# Altium PCB ATLAS_XP2V5.2016.11.14_BACKUP.PcbDoc (part 1 of 3)
Units mil, origin at the board's own origin, x right, y up, seen from the top; angles counter-clockwise.
Board outline 6300 x 9190 mil, 4 copper layers (Primary Component Side, Ground Plane, Power Plane, Secondary Component Side), stack 35.4 mil thick; 150 components, 228 nets, 1053 pads, 279 vias.
Unrouted connection lines stored in the file: 9.
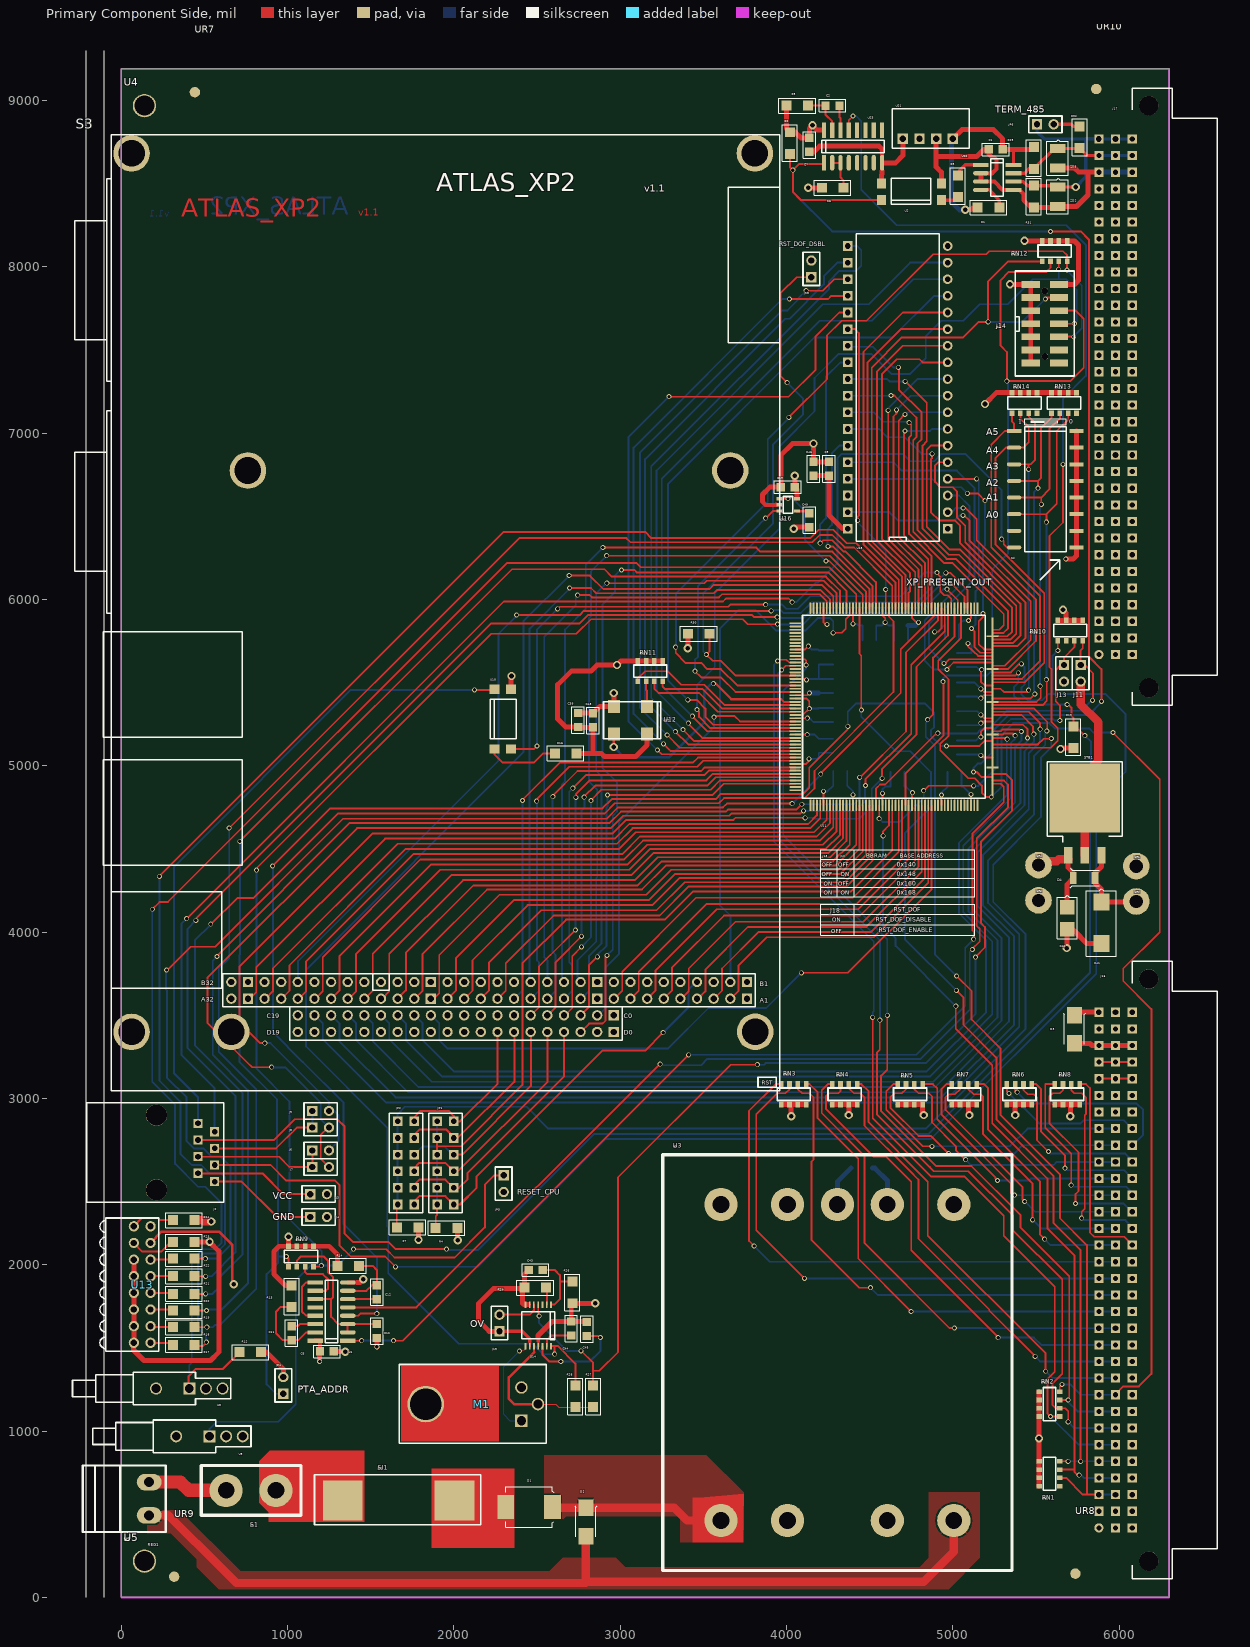
[diagram p0: Primary Component Side view]
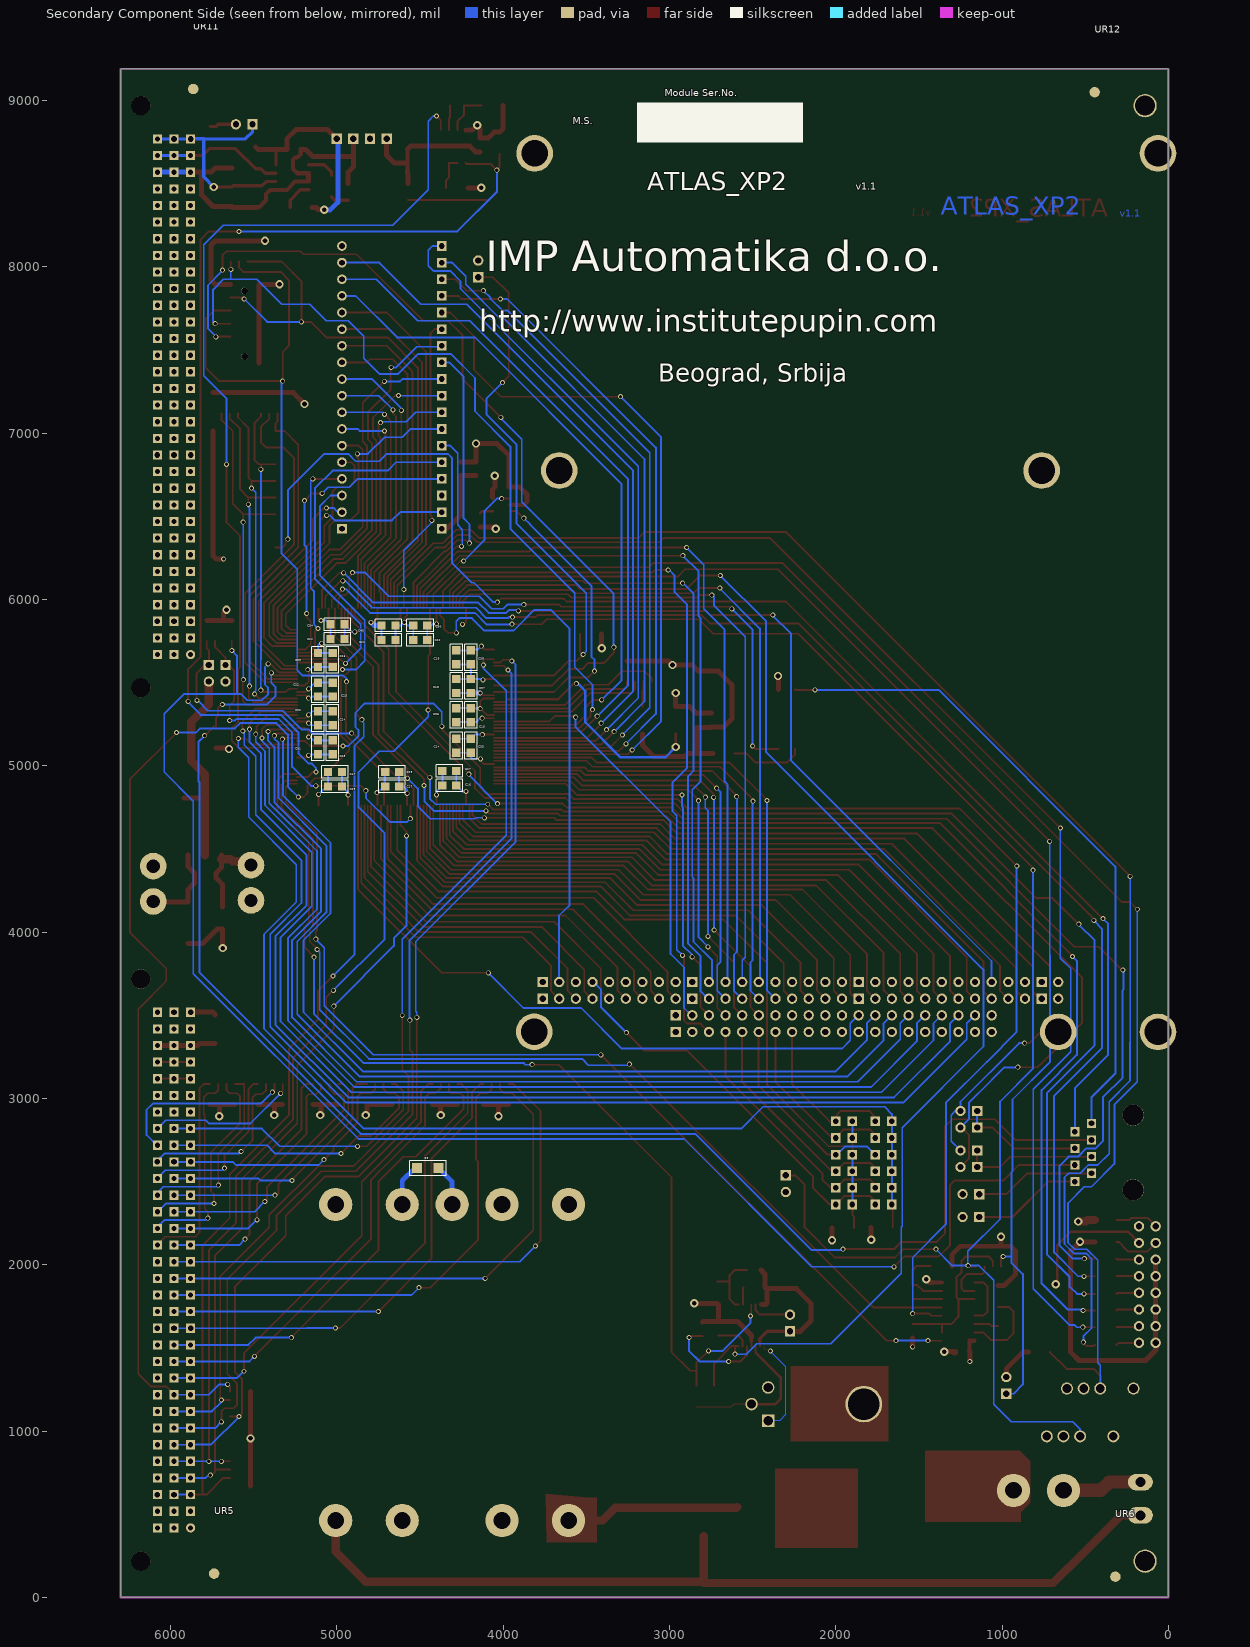
[diagram p1: Secondary Component Side view, seen from below]
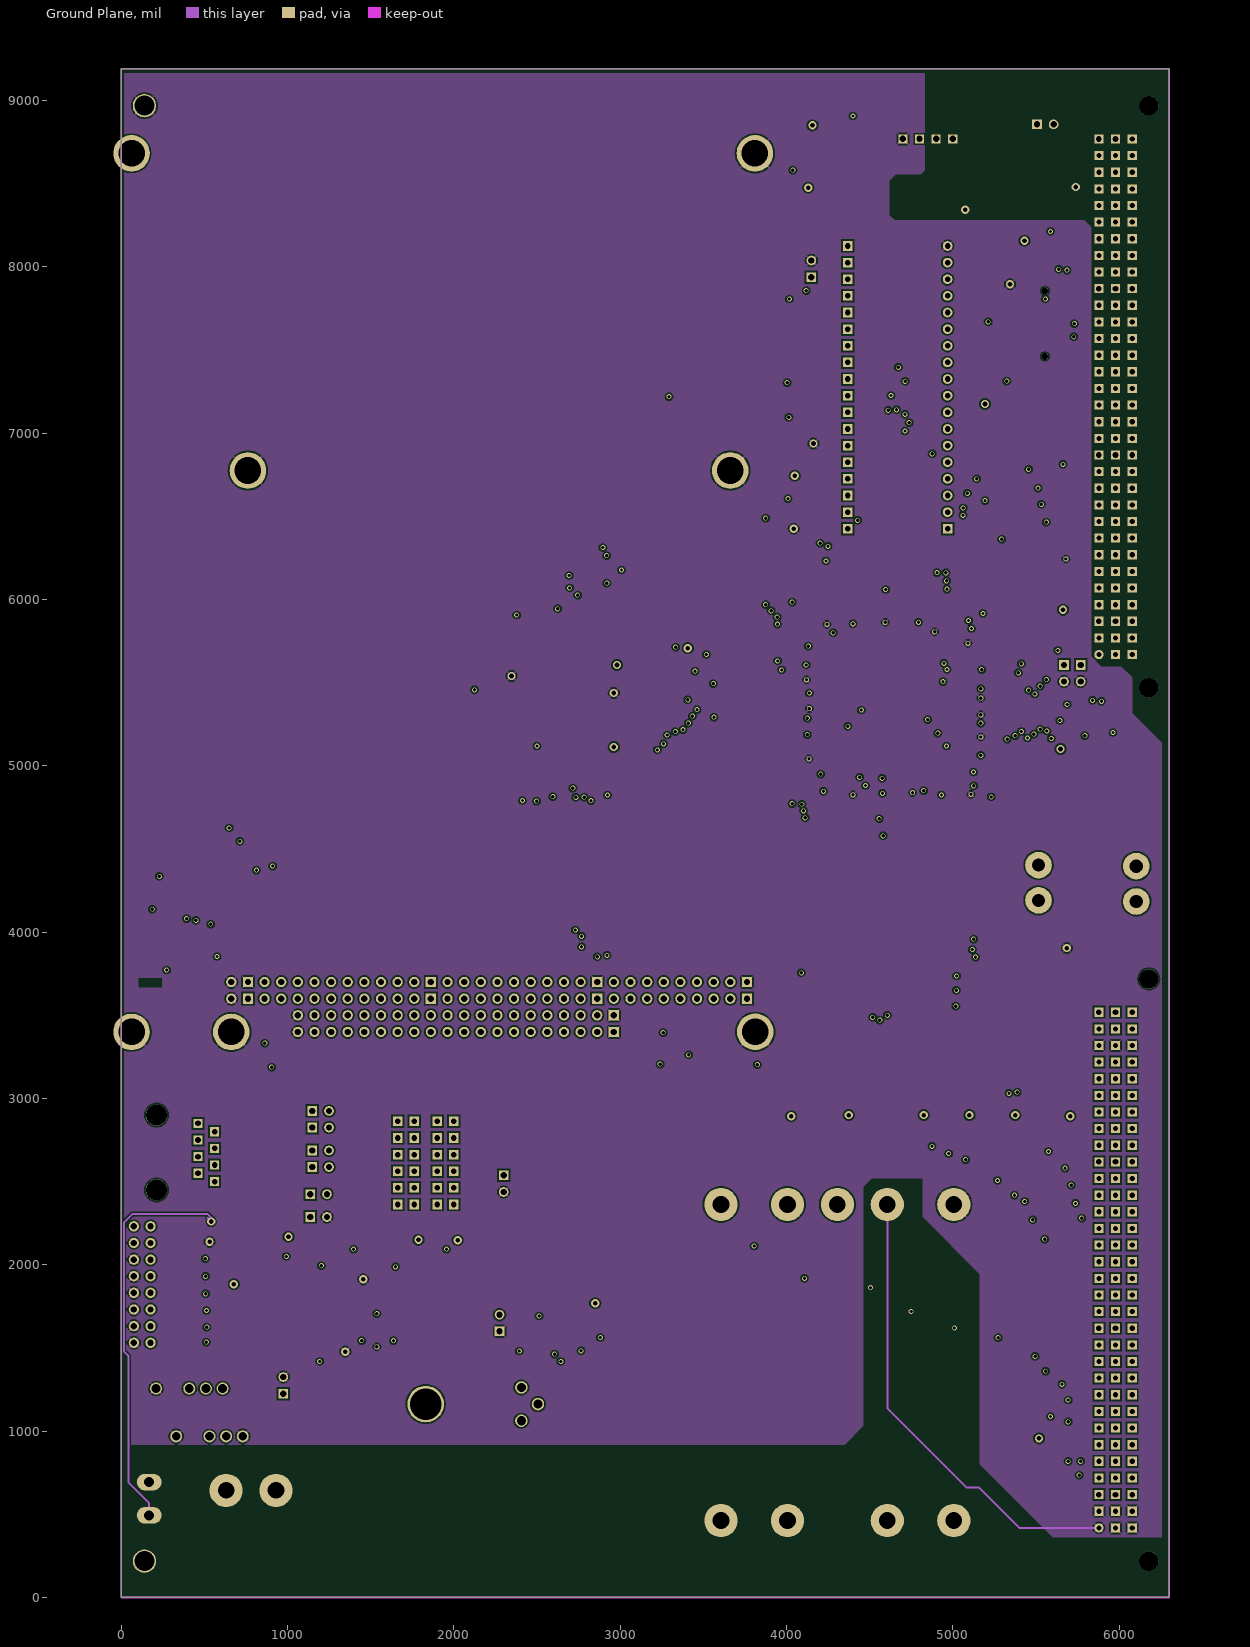
[diagram p2: Ground Plane]
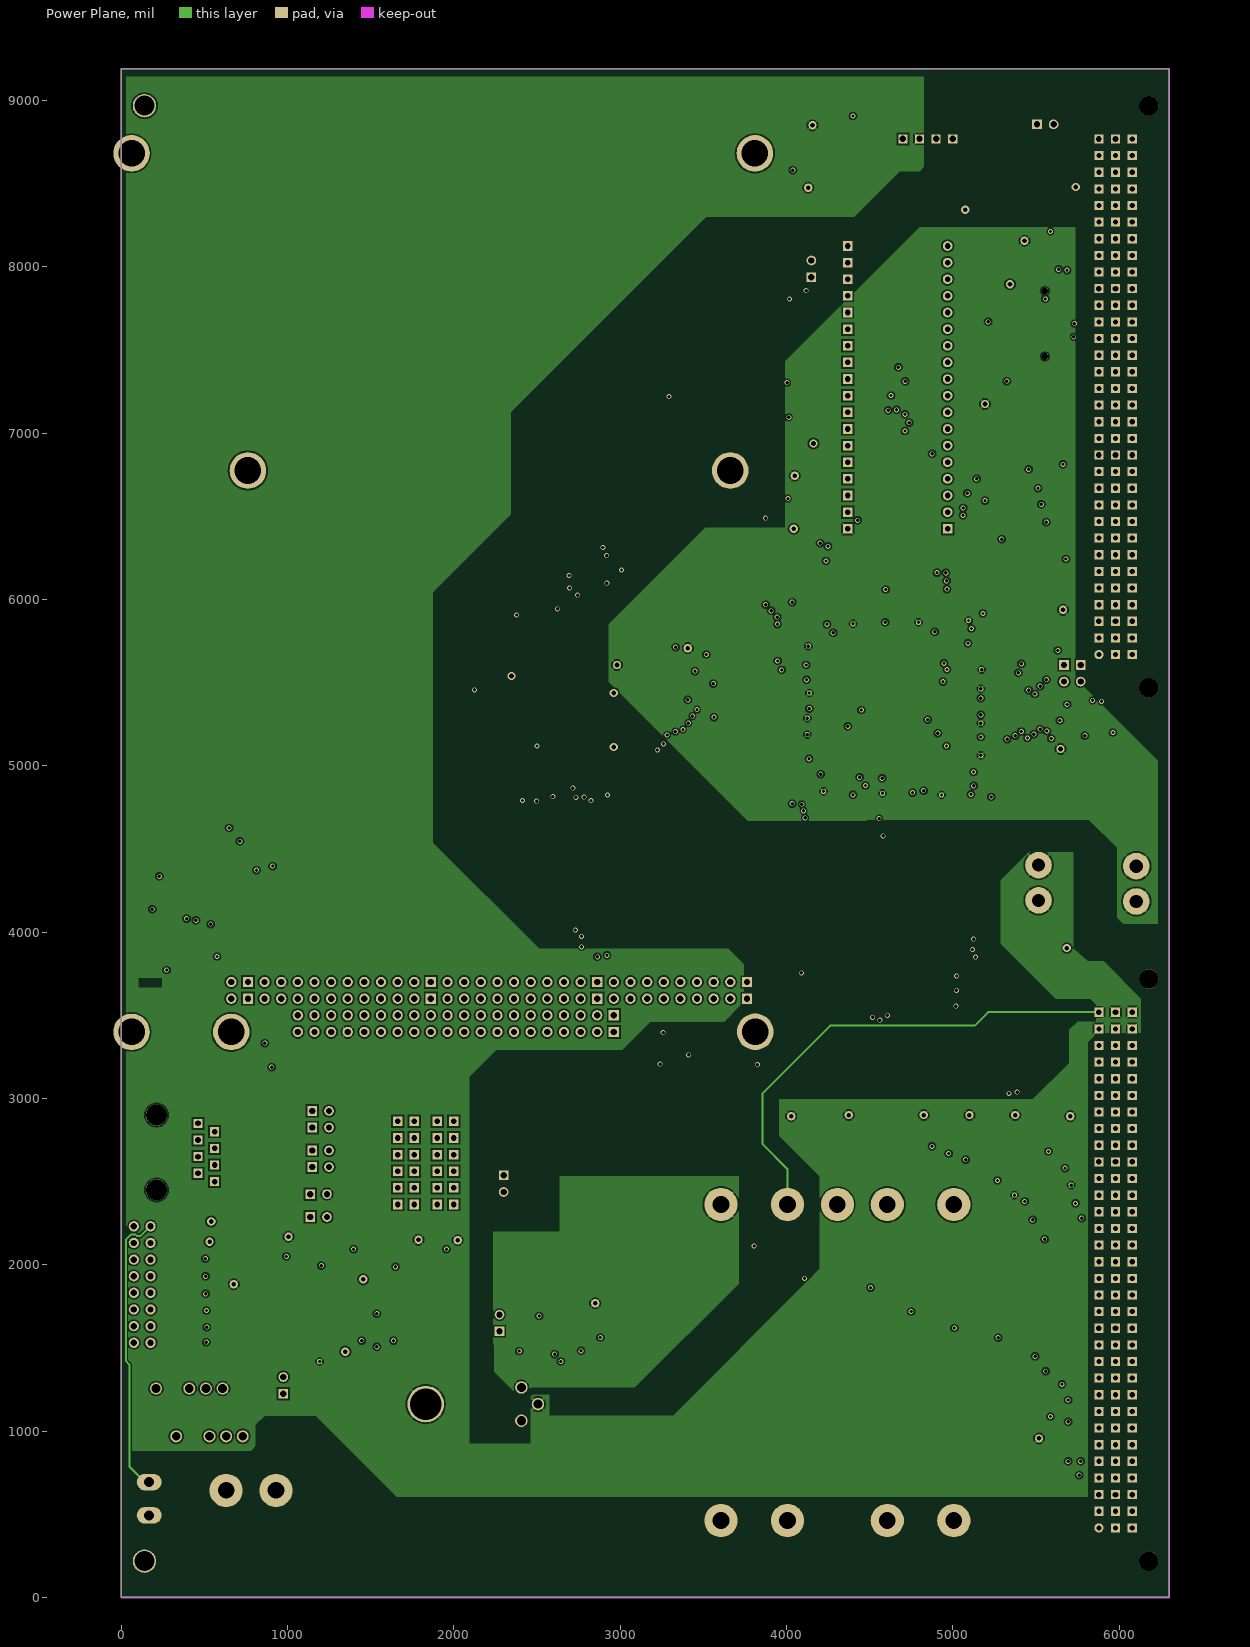
[diagram p3: Power Plane]

## Layer stack, top to bottom
Solder Mask Top: solder mask 0.4, Solder Resist, Dk 3.5
Primary Component Side: signal copper 1.35
Dielectric 1: dielectric 10, FR-4, Dk 4.3
Ground Plane: signal copper 1.35
Dielectric2: dielectric 10, FR-4, Dk 4.3
Power Plane: signal copper 1.35
Dielectric3: dielectric 10, FR-4, Dk 4.3
Secondary Component Side: signal copper 1.35
Solder Mask Bottom: solder mask 0.4, Solder Resist, Dk 3.5

## Board outline
6300,0 6300,9190 0,9190 0,0

## Design rules (kind name [scope] priority, off if disabled: settings)
Clearance "Clearance - Net - VCC_+5V- SMD" [InNet('VCC_+5V') AND IsVia vs IsSMTPin] p1: gap=6
Clearance "Clearance - Net - VCC_+5V - Via" [InNet('VCC_+5V') And IsVia vs IsVia] p2: gap=6
Clearance "Clearance - Default - DEFAULT- SMD" [IsVia vs IsSMTPin] p3: gap=12
Clearance "Clearance - Default - DEFAULT - Via" [IsVia vs IsVia] p4: gap=12
Clearance "Clearance - Default - DEFAULT - Net" [All] p5: gap=10
ComponentClearance "ComponentClearance - Default - DEFAULT" [All] p1: gap=6 collisioncheckmode=3 verticalgap=10 showdistances=FALSE
FanoutControl Fanout_LCC [IsLCC] p1: bgadir=Out bgaviamode=Centered fanoutstyle=Auto fanoutdirection=Alternating viagrid=1 // Fanout_LCC (Default Rule)
FanoutControl Fanout_BGA [IsBGA] p2: bgadir=Out bgaviamode=Centered fanoutstyle=Auto fanoutdirection=Alternating viagrid=1 // Fanout_BGA (Default Rule)
FanoutControl Fanout_Small [(CompPinCount < 5)] p3: bgadir=Out bgaviamode=Centered fanoutstyle=Auto fanoutdirection=OutThenIn viagrid=1 // Fanout_Small (Default Rule)
FanoutControl Fanout_SOIC [IsSOIC] p4: bgadir=Out bgaviamode=Centered fanoutstyle=Auto fanoutdirection=Alternating viagrid=1 // Fanout_SOIC (Default Rule)
HoleToHoleClearance "HoleToHoleClearance - Default - DEFAULT" [All] p1: gap=6 allowstackedmicrovias=TRUE
Length "Default Length" [All] p1: maxlimit=50000 minlimit=0
MaxMinImpedance "Default Impedance" [All] p1: minimum=50.00 maximum=150.0
ParallelSegment "Default Parallel Segment Adjasent" [All] p1: limit=1000 gap=200
ParallelSegment "Default Parallel Segment Same Layer" [All] p2: limit=1000 gap=200
PlaneClearance "PlaneClearance - FootPrint 'MTH_IZVLAKAC_PADS'" [HasFootprint('MTH_IZVLAKAC_PADS')] p1: clearance=5 // PAD - Power Plane Clearance
PlaneClearance "PlaneClearance - FootPrint 'MTH_IZVLAKAC'" [HasFootprint('MTH_IZVLAKAC')] p2: clearance=5 // PAD - Power Plane Clearance
PlaneConnect "Default PlaneConnect" [All] p1: planeconnectstyle=Relief reliefexpansion=20 reliefentries=0 reliefconductorwidth=10 reliefairgap=10
PolygonConnect "PolygonConnect - Default SMT" [IsSMTPin] p1: connectstyle=Relief reliefconductorwidth=10 reliefentries=4 polygonreliefangle="45 Angle" airgapwidth=10
PolygonConnect "PolygonConnect - Default Pad" [All] p2: connectstyle=Relief reliefconductorwidth=10 reliefentries=4 polygonreliefangle="45 Angle" airgapwidth=10
RoomDefinition ISA_XILINX [InComponentClass('ISA_XILINX')] p1: confinementstyle=ConfineIn formatcopy=TRUE lockcomponents=FALSE outline -31225,-29187.5 -29225,-29187.5 -29225,-28187.5 -31225,-28187.5
RoomDefinition WDT_TASTERI_M_S [InComponentClass('WDT_TASTERI_M_S')] p2: confinementstyle=ConfineIn formatcopy=TRUE lockcomponents=FALSE outline -31225,-29187.5 -29225,-29187.5 -29225,-28187.5 -31225,-28187.5
RoomDefinition POWER_SUPPLY [InComponentClass('POWER_SUPPLY')] p3: confinementstyle=ConfineIn formatcopy=TRUE lockcomponents=FALSE outline -31225,-29187.5 -29225,-29187.5 -29225,-28187.5 -31225,-28187.5
RoomDefinition MAX_BUS [InComponentClass('MAX_BUS')] p4: confinementstyle=ConfineIn formatcopy=TRUE lockcomponents=FALSE outline -31225,-29187.5 -29225,-29187.5 -29225,-28187.5 -31225,-28187.5
RoomDefinition "ATLAS_XP2V5.Sheet 5" [InComponentClass('ATLAS_XP2V5.Sheet 5')] p5: confinementstyle=ConfineIn formatcopy=TRUE lockcomponents=FALSE outline -31225,-29187.5 -29225,-29187.5 -29225,-28187.5 -31225,-28187.5
RoutingLayers "RoutingLayers - Default - DEFAULT" [All] p1: top layer_v5=TRUE mid layer 1_v5=TRUE mid layer 2_v5=TRUE bottom layer_v5=TRUE
RoutingPriority "RoutingPriority - Default - DEFAULT" [All] p1: routingpriority=3
RoutingTopology "Default Routing Topology" [All] p1: topology=Shortest
RoutingVias "RoutingVias - Default - DEFAULT" [All] p1: holewidth=20 width=30 viastyle="Through Hole" minholewidth=20 minwidth=30 maxholewidth=20 maxwidth=30
SMDToCorner "SMDToCorner - Net - VCC_+5V" [InNet('VCC_+5V')] p1: distance=60000
SMDToCorner "SMDToCorner - Default - DEFAULT" [All] p2: distance=120000
SolderMaskExpansion [All] p1: expansion=4
Width "Default Width" [All] p1: maxlimit=50 minlimit=10 preferedwidth=12
19 further rules are at their usual default settings.

## Classes and differential pairs
component class WDT_TASTERI_M_S: C10 C11 C12 J2 J3 J4 J5 J6 J7 J8 JP4 JP5 R12 R13 R14 R15 R16 RN9 U1 U8 U9 U10
component class POWER_SUPPLY: C43 C44 C45 D1 D2 J15 M1 R9 R26 R27 R28 R29 REG1 S1 SI1 U3 U14
component class MAX_BUS: C1 C2 C6 C7 D3 J16 J17 JP1 JP2 JP6 R1 R2 R3 R4 R5 R6 R7 R25 R31 R32 RN1 RN2 RN3 RN4 RN5 RN6 RN7 RN8 U2 US1 US2 US3 ZD2 ZD3
component class ISA_XILINX: C14 C15 C16 C17 C18 C19 C20 C21 C22 C23 C24 C25 C26 C27 C28 C29 C30 C31 C32 C33 C34 C35 C36 C37 C38 C39 C40 C41 C42 C47 C48 C50 D4 J11 J13 J14 J18 R17 R18 R19 R20 R21 R22 R23 R24 R30 RN10 RN11 RN12 RN13 RN14 S2 S3 STB1 U4 U5 U11 U12 U13 UR1 UR2 UR3 UR4 UR5 UR6 UR7 UR8 UR9 UR10 UR11 UR12
component class "ATLAS_XP2V5.Sheet 5": C9 C13 C46 C49 U15 U16

## Components (designator, comment, footprint, x,y, rotation, side; value= is the part's Value field where it differs from the comment)
C1 "C" SM$2F$C_0805 5300,8706.25 r180 top
C2 "C" SM$2F$C_0805 4318.75,8968.75 r180 top
C6 "C" SM$2F$C_0805 1195.36,1479.38 r0 top
C7 "C" SM$2F$C_0805 4137.5,8775 r270 top
C9 "C" SM$2F$C_0805 4256.25,6743.75 r90 top
C10 "C_2" SM$2F$C_0805 1537.5,1643.75 r270 top
C11 "C_2" SM$2F$C_0805 1025,1631.25 r270 top
C12 "C_2" SM$2F$C_0805 1537.5,1793.75 r90 top
C13 "C" SM$2F$C_0805 4050,6675 r180 top
C14 "C" SM$2F$C_0805_C14 4281.25,5162.5 r270 bottom
C15 "C" SM$2F$C_0805_C14 4193.75,5262.5 r90 bottom
C16 "C" SM$2F$C_0805_C14 4281.25,4881.25 r0 bottom
C17 "C" SM$2F$C_0805_C14 4625,4875 r0 bottom
C18 "C" SM$2F$C_0805_C14 4281.25,5437.5 r90 bottom
C19 "C" SM$2F$C_0805_C14 4281.25,5693.75 r270 bottom
C20 "C" SM$2F$C_0805_C14 4456.25,5756.25 r0 bottom
C21 "C" SM$2F$C_0805_C14 4731.25,5756.25 r180 bottom
C22 "C" SM$2F$C_0805_C14 5037.5,5762.5 r180 bottom
C23 "C" SM$2F$C_0805_C14 5025,5500 r270 bottom
C24 "C" SM$2F$C_0805_C14 5025,5243.75 r90 bottom
C25 "C" SM$2F$C_0805_C14 4625,4962.5 r0 bottom
C26 "C" SM$2F$C_0805_C14 5025,5593.75 r90 bottom
C27 "C" SM$2F$C_0805_C14 4281.25,4968.75 r0 bottom
C28 "C" SM$2F$C_0805_C14 5025,5068.75 r90 bottom
C29 "C" SM$2F$C_0805_C14 4968.75,4875 r0 bottom
C30 "C" SM$2F$C_0805_C14 5112.5,5243.75 r90 bottom
C31 "C" SM$2F$C_0805_C14 5112.5,5068.75 r90 bottom
C32 "C" SM$2F$C_0805_C14 5112.5,5500 r270 bottom
C33 "C" SM$2F$C_0805_C14 5112.5,5593.75 r90 bottom
C34 "C" SM$2F$C_0805_C14 5037.5,5850 r180 bottom
C35 "C" SM$2F$C_0805_C14 4193.75,5162.5 r270 bottom
C36 "C" SM$2F$C_0805_C14 4281.25,5262.5 r90 bottom
C37 "C" SM$2F$C_0805_C14 4193.75,5437.5 r90 bottom
C38 "C" SM$2F$C_0805_C14 4193.75,5693.75 r270 bottom
C39 "C" SM$2F$C_0805 2748.25,5233 r90 top
C40 "C_4" SM$2F$C_0805_C14 4731.25,5843.75 r180 bottom
C41 "C_4" CASE_D_MILOS 5893.75,4181.25 r270 top
C42 "C_4" CASE_B_MILOS 5687.5,4150 r270 top
C43 "C_3" SM$2F$C_0805 2450,1968.75 r0 top
C44 "C_3" SM$2F$C_0805 2706.25,1575 r90 top
C45 "C_3" SM$2F$C_0805 2800,1656.25 r270 top
C46 "C" SM$2F$C_0805 4162.5,6743.75 r90 top
C47 "C" SM$2F$C_0805_C14 4968.75,4962.5 r0 bottom
C48 "C" SM$2F$C_0805 2837.5,5231.25 r90 top
C49 "C" SM$2F$C_0805 4137.5,6518.75 r270 top
C50 "C_4" SM$2F$C_0805_C14 4456.25,5843.75 r0 bottom
D1 "DIODE_SCHOTTKY_0" SM$2F$DO214AB_21 2312.5,543.75 r180 top
D2 "TRANZORB_0" SM$2F$DO214AC_21 2793.75,368.75 r270 top
D3 "TRANZORB_0" SM$2F$DO214AC_21 5731.25,3331.25 r270 top
D4 "DIODE_ZENER_1" BZV55-C3V3 5725,4325 r0 top
J2 "8_HEADER" TELE$2F$TM.420FACE$2F$8X8_J2 462.5,2850 r90 top
J3 "B2S_0" JUMPER_100_J3 1137.5,2425 r270 top
J4 "B2S_0" JUMPER_100_J3 1137.5,2287.5 r270 top
J5 "B2S_0" JUMPER_100_J3 1150,2925 r270 top
J6 "B2S_0" JUMPER_100_J3 1150,2687.5 r270 top
J7 "B2S_0" JUMPER_100_J3 1150,2587.5 r270 top
J8 "B2S_0" JUMPER_100_J3 1150,2825 r270 top
J11 "HEADER_2/SM" JUMPER_100_J3 5768.75,5606.25 r180 top
J13 "HEADER_2/SM" JUMPER_100_J3 5668.75,5606.25 r180 top
J14 "CONN_FLEX_16/SM" JTAG_SMD_REV2_J14 5468.75,7893.75 r270 top
J15 "B2S_0" JUMPER_100_J3 2275,1600 r0 top
J16 "DIN_96_ABC-R" DIN96_ABC$2F$R_J16 6078.5,3518.5 r270 top
J17 "DIN_96_ABC-R" DIN96_ABC$2F$R_J16 6078.5,8768.5 r270 top
J18 "HEADER_2/SM" JUMPER_100_J3 4150,7937.5 r0 top
JP1 "HEADER_6X2" BLKCON.100$2F$VH$2F$TM2OE$2F$W.200$2F$12_JP1 2000,2362.5 r90 top
JP2 "HEADER_6X2" BLKCON.100$2F$VH$2F$TM2OE$2F$W.200$2F$12_JP2 1762.5,2362.5 r90 top
JP4 "HEADER_2" JUMPER_100_J3 975,1225 r0 top
JP5 "HEADER_2" JUMPER_100_J3 2300,2537.5 r180 top
JP6 "HEADER_2" JUMPER_100_J3 5506.25,8856.25 r270 top
M1 "IRF3415_BODY" IRF3415_PADS_REV1 2506.25,1062.5 r90 top
R1 "RESISTOR_2" SM$2F$R_1206 5150,8356.25 r0 top
R2 "RESISTOR_2" SM$2F$R_1206 4021.25,8808.75 r270 top
R3 "RESISTOR_2" SM$2F$R_1206 5031.25,8550 r270 top
R4 "RESISTOR_2" SM$2F$R_1206 2021.25,2221.25 r180 top
R5 "RESISTOR_2" SM$2F$R_1206 4000,8968.75 r0 top
R6 "RESISTOR_2" SM$2F$R_1206 4212.5,8475 r0 top
R7 "RESISTOR_2" SM$2F$R_1206 1787.5,2225 r180 top
R9 "RESISTOR" SM$2F$R_1206_R9 4387.5,2581.25 r0 bottom
R12 "RESISTOR_2" SM$2F$R_1206 712.5,1475 r0 top
R13 "RESISTOR_2" SM$2F$R_1206 1025,1875 r270 top
R14 "RESISTOR_2" SM$2F$R_1206 1300,1993.75 r0 top
R15 "RESISTOR_2" SM$2F$R_1206 5725,5237.5 r270 top
R16 "RESISTOR_2" SM$2F$R_1206 2737.5,5075 r180 top
R17 "R" SM$2F$R_1206 312.5,1518.75 r0 top
R18 "R" SM$2F$R_1206 312.5,1625 r0 top
R19 "R" SM$2F$R_1206 312.5,1725 r0 top
R20 "R" SM$2F$R_1206 312.5,1825 r0 top
R21 "R" SM$2F$R_1206 312.5,1931.25 r0 top
R22 "R" SM$2F$R_1206 312.5,2037.5 r0 top
R23 "RESISTOR_2" SM$2F$R_1206 312.5,2137.5 r0 top
R24 "RESISTOR_2" SM$2F$R_1206 312.5,2268.75 r0 top
R25 "R" SM$2F$R_1206 5487.5,8718.75 r270 top
R26 "R" SM$2F$R_1206 2712.5,1768.75 r90 top
R27 "R" SM$2F$R_1206 2837.5,1143.75 r90 top
R28 "R" SM$2F$R_1206 2731.25,1143.75 r90 top
R29 "R" SM$2F$R_1206 2425,1862.5 r0 top
R30 "R" SM$2F$R_1206 3537.5,5793.75 r180 top
R31 "R" SM$2F$R_1206 5487.5,8487.5 r270 top
R32 "RESISTOR_2" SM$2F$R_1206 5762.5,8843.75 r270 top
REG1 "8_REGLETA_4" REG2_REV8_REG1 168.75,693.75 r0 top
RN1 "RESAR_IS_4/SM" SMD_RX4 5518.75,818.75 r270 top
RN2 "RESAR_IS_4/SM" SMD_RX4 5518.75,1237.5 r270 top
RN3 "RESAR_IS_4/SM" SMD_RX4 3968.75,2962.5 r0 top
RN4 "RESAR_IS_4/SM" SMD_RX4 4275,2962.5 r0 top
RN5 "RESAR_IS_4/SM" SMD_RX4 4668.75,2962.5 r0 top
RN6 "RESAR_IS_4/SM" SMD_RX4 5325,2962.5 r0 top
RN7 "RESAR_IS_4/SM" SMD_RX4 4993.75,2962.5 r0 top
RN8 "RESAR_IS_4/SM" SMD_RX4 5612.5,2962.5 r0 top
RN9 "RESAR_IS_4/SM" SMD_RX4 1156.25,2112.5 r180 top
RN10 "RESAR_IS_4/SM" SMD_RX4 5781.25,5875 r180 top
RN11 "RESAR_IS_4/SM" SMD_RX4 3256.25,5631.25 r180 top
RN12 "RESAR_IS_4/SM" SMD_RX4 5687.5,8156.25 r180 top
RN13 "RESAR_IS_4/SM" SMD_RX4 5743.75,7243.75 r180 top
RN14 "RESAR_IS_4/SM" SMD_RX4 5506.25,7243.75 r180 top
S1 "SW_SPST_0" SW12V_REV2_S1 631.25,643.75 r0 top
S2 "SW_DIP-8" SMD_DIPSW_100 5368.75,7012.5 r270 top
S3 "CON_EISAE_0" WAFER_PADS_REV2 662.5,3600 r0 top
SI1 "FUSE" FUSEHOLDER3_SI1 1212.5,462.5 r0 top
STB1 "LM3940-3_3V" TO263AA_GND_PLANE_REV1 5693.75,4462.5 r90 top
U1 "74HCT123_1" SOG.050$2F$16$2F$WG.244$2F$L.375 1362.5,1543.75 r90 top
U2 "LTV-817_0" LTV814S 4931.25,8400 r90 top
U3 "VICOR" VIKOR1 5006.25,2362.5 r180 top
U4 "MTHOLE_IZVLAKAC" MTH_IZVLAKAC_PADS 140.55,8968.5 r0 top
U5 "MTHOLE_IZVLAKAC" MTH_IZVLAKAC_PADS 140.55,218.5 r0 top
U8 "SWITCH_BOJKE" TP33WW080-SPST_PADS 410,1256.25 r90 top
U9 "SWITCH_BOJKE" TP33WW080-SPST_PADS 531.25,968.75 r90 top
U10 "LTV-817" LTV814S 2243.75,5100 r0 top
U11 "XCR3256XL-TQ208" QUAD.50M$2F$208$2F$WG30.60_U11 4143.75,4762.5 r0 top
U12 "CLK_GEN33" CLK_GEN33_REV1_U12 3162.5,5356.25 r180 top
U13 "LED8X1" LED_8_REV3_PADS 127,2081.25 r90 top
U14 "TPS2410_1" PDSO-G14_REV7 2431.25,1737.5 r0 top
U15 "DS1265W" DIP.100$2F$36$2F$W.600$2F$L1.850 4968.75,6425 r90 top
U16 "MAX825_T" SOT23_5_MILOS_REV4 3962.5,6606.25 r0 top
UR1 "NAPAJANE_RUPA" NAPAJANJE_RUPA_REV1 6093.75,4356.25 r0 top
UR2 "NAPAJANE_RUPA" NAPAJANJE_RUPA_REV1 6093.75,4143.75 r0 top
UR3 "NAPAJANE_RUPA" NAPAJANJE_RUPA_REV1 5506.25,4150 r0 top
UR4 "NAPAJANE_RUPA" NAPAJANJE_RUPA_REV1 5506.25,4362.5 r0 top
UR5 "FIDUCIAL_PADS" FIDUCIAL_R_TOP 5737.5,143.75 r180 bottom
UR6 "FIDUCIAL_PADS" FIDUCIAL_R_TOP 318.75,125 r180 bottom
UR7 "FIDUCIAL_PADS" FIDUCIAL_R_TOP 443.75,9050 r0 top
UR8 "FIDUCIAL_PADS" FIDUCIAL_R_TOP 5737.5,143.75 r0 top
UR9 "FIDUCIAL_PADS" FIDUCIAL_R_TOP 318.75,125 r0 top
UR10 "FIDUCIAL_PADS" FIDUCIAL_R_TOP 5862.5,9068.75 r0 top
UR11 "FIDUCIAL_PADS" FIDUCIAL_R_TOP 5862.5,9068.75 r180 bottom
UR12 "FIDUCIAL_PADS" FIDUCIAL_R_TOP 443.75,9050 r180 bottom
US1 "HNMODUL0505" DCDC55 4700,8893.75 r0 top
US2 "75176" SOG.050$2F$8$2F$WG.244$2F$L.225 5168.75,8612.5 r270 top
US3 "74HC123_0" SOG.050$2F$16$2F$WG.244$2F$L.375 4225,8625 r0 top
ZD2 "DIODE_ZENER_0" SM$2F$D_1206_21 5631.25,8362.5 r270 top
ZD3 "DIODE_ZENER_0" SM$2F$D_1206_21 5631.25,8593.75 r270 top

## Footprints (in the part's own frame and the unit in brackets; to place one, negate y for a bottom-side part, rotate by r counter-clockwise, add the part's x,y. Pads: shape width x height; smd on the part's side, far side on the other; paste and mask are expansions set on the pad)
BLKCON.100$2F$VH$2F$TM2OE$2F$W.200$2F$12_JP1 [mil]
  rect 58x58 hole 34: 1(0,0) 2(0,100) 3(100,0) 4(100,100) 5(200,0) 6(200,100) 7(300,0) 8(300,100) 9(400,0) 10(400,100) 11(500,0) 12(500,100)
  silkscreen extent -50,-50 550,150
BLKCON.100$2F$VH$2F$TM2OE$2F$W.200$2F$12_JP2 [mil]
  rect 58x58 hole 34: 1(0,0) 2(0,100) 3(100,0) 4(100,100) 5(200,0) 6(200,100) 7(300,0) 8(300,100) 9(400,0) 10(400,100) 11(500,0) 12(500,100)
  silkscreen extent -50,-50 550,150
BZV55-C3V3 [mil]
  rect 40x70 smd paste-2: 1(130,0) 2(0,0)
  silkscreen extent -19,-59 156,59
CASE_B_MILOS [mil]
  rect 86x86 smd: 1(0,0) 2(132,0)
  silkscreen extent -72,-60 191,60
CASE_D_MILOS [mil]
  rect 104x96 smd: 1(0,0) 2(250,0)
  silkscreen extent -80,-90 328,90
CLK_GEN33_REV1_U12 [mil]
  rect 71x79 smd: 1(0,0) 2(200,0) 3(200,165) 4(0,165)
  silkscreen extent -81,-28 262,194
DCDC55 [mil]
  rect 62x62 / inner rect 55x55 / far side rect 62x62 hole 38 mask+2.5: 1(0,-125) 2(100,-125) 3(200,-125) 4(300,-125)
  silkscreen extent -62,-181 400,56
DIN96_ABC$2F$R_J16 [mil]
  rect 55x55 hole 31: A1(0,0) A2(100,0) A3(200,0) A4(300,0) A5(400,0) A6(500,0) A7(600,0) A8(700,0) A9(800,0) A11(1000,0) A12(1100,0) A13(1200,0) A14(1300,0) A15(1400,0) A16(1500,0) A17(1600,0) A18(1700,0) A19(1800,0) A21(2000,0) A22(2100,0) A23(2200,0) A24(2300,0) A25(2400,0) A26(2500,0) A27(2600,0) A28(2700,0) A29(2800,0) A31(3000,0) A32(3100,0) B2(100,-100) B3(200,-100) B4(300,-100) B5(400,-100) B6(500,-100) B7(600,-100) B8(700,-100) B9(800,-100) B11(1000,-100) B12(1100,-100) B13(1200,-100) B14(1300,-100) B15(1400,-100) B16(1500,-100) B17(1600,-100) B18(1700,-100) B19(1800,-100) B21(2000,-100) B22(2100,-100) B23(2200,-100) B24(2300,-100) B25(2400,-100) B26(2500,-100) B27(2600,-100) B28(2700,-100) B29(2800,-100) B31(3000,-100) B32(3100,-100) C2(100,-200) C3(200,-200) C4(300,-200) C5(400,-200) C6(500,-200) C7(600,-200) C8(700,-200) C9(800,-200) C11(1000,-200) C12(1100,-200) C13(1200,-200) C14(1300,-200) C15(1400,-200) C16(1500,-200) C17(1600,-200) C18(1700,-200) C19(1800,-200) C21(2000,-200) C22(2100,-200) C23(2200,-200) C24(2300,-200) C25(2400,-200) C26(2500,-200) C27(2600,-200) C28(2700,-200) C29(2800,-200) C31(3000,-200)
  rect 55x55 hole 34: A10(900,0) A20(1900,0) A30(2900,0) B1(0,-100) B10(900,-100) B20(1900,-100) B30(2900,-100) C1(0,-200) C10(900,-200) C20(1900,-200) C30(2900,-200)
  round 55 hole 31: C32(3100,-200)
  round 116 hole 116: HOLE3(-200,100) HOLE4(3300,100)
  silkscreen extent -305,0 3405,510
DIP.100$2F$36$2F$W.600$2F$L1.850 [mil]
  rect 58x58 hole 34: 1(0,0) 19(1700,600) 20(1600,600) 21(1500,600) 22(1400,600) 23(1300,600) 24(1200,600) 25(1100,600) 26(1000,600) 27(900,600) 28(800,600) 29(700,600) 30(600,600) 31(500,600) 32(400,600) 33(300,600) 34(200,600) 35(100,600) 36(0,600)
  round 58 hole 34: 2(100,0) 3(200,0) 4(300,0) 5(400,0) 6(500,0) 7(600,0) 8(700,0) 9(800,0) 10(900,0) 11(1000,0) 12(1100,0) 13(1200,0) 14(1300,0) 15(1400,0) 16(1500,0) 17(1600,0) 18(1700,0)
  silkscreen extent -75,50 1775,550
FIDUCIAL_R_TOP [mil]
  round 63 smd paste-31.5 mask+31.5: 1(0,0)
FUSEHOLDER3_SI1 [mil]
  rect 240x240 smd mask+2.5: 1(120,120) 2(792.5,120)
  silkscreen extent -50,-25 950,275
IRF3415_PADS_REV1 [mil]
  rect 75x75 / inner round 75 / far side rect 75x75 hole 55 mask+2.5: 1(0,100)
  round 75 hole 55 mask+2.5: 2(100,0) 3(200,100)
  round 220 hole 190: 4(100,675)
  Primary Component Side region: -123,235.5 327,235.5 327,823 -123,823 -123,235.5
  silkscreen extent -135,-50 338,835
JTAG_SMD_REV2_J14 [mil]
  rect 40x110 smd: 1(0,0) 2(0,170) 3(78.7,0) 4(78.7,170) 5(157.5,0) 6(157.5,170) 7(236.22,0) 8(236.22,170) 9(315,0) 10(315,170) 11(393.7,0) 12(393.7,170) 13(472.43,0) 14(472.43,170)
  round 40 hole 40 mask-20: 15(39,85) 16(433,85)
  silkscreen extent -81,-94 550,263
JUMPER_100_J3 [mil]
  rect 62x62 / inner rect 58x58 / far side rect 62x62 hole 38 mask+2.5: 1(0,0)
  round 62 / inner round 58 / far side round 62 hole 38 mask+2.5: 2(0,100)
  silkscreen extent -50,-50 50,150
LED_8_REV3_PADS [mil]
  round 62 hole 38 mask+2.5: 1(-550,-50) 2(-450,-50) 3(-350,-50) 4(-250,-50) 5(-150,-50) 6(-50,-50) 7(50,-50) 8(150,-50) 9(-550,50) 10(-450,50) 11(-350,50) 12(-250,50) 13(-150,50) 14(-50,50) 15(50,50) 16(150,50)
  silkscreen extent -600,-100 200,254
LTV814S [mil]
  rect 60x55 smd: 1(0,0) 2(100,0) 3(100,360) 4(0,360)
  silkscreen extent -25,62 131,300
MTH_IZVLAKAC_PADS [mil]
  round 140 hole 120: 1(0,0)
NAPAJANJE_RUPA_REV1 [mil]
  round 160 hole 80 mask+2.5: 1(9.37,40.62)
PDSO-G14_REV7 [mil]
  rect 9.83x39.37 smd paste-1.68: 1(153.53,23) 2(127.95,23) 3(102.35,23) 4(76.77,23) 5(50.38,23) 6(26,23) 7(0,23) 8(0,-228.52) 9(25.58,-228.52) 10(51.17,-228.52) 11(76.77,-228.52) 12(101.97,-228.52) 13(128.33,-228.52) 14(153.53,-228.52)
  silkscreen extent -24,-187 177,-20
QUAD.50M$2F$208$2F$WG30.60_U11 [mil]
  rect 11x70 smd paste-3.5: 1(0,0) 10(177.3,0) 20(374.3,0) 30(571.3,0) 40(768.3,0) 50(965.3,0) 53(1094.7,90) 54(1094.7,109.7) 55(1094.7,129.4) 56(1094.7,149.1) 57(1094.7,168.8) 58(1094.7,188.5) 59(1094.7,208.2) 61(1094.7,247.6) 62(1094.7,267.3) 63(1094.7,287) 64(1094.7,306.7) 65(1094.7,326.4) 66(1094.7,346.1) 67(1094.7,365.8) 68(1094.7,385.5) 69(1094.7,405.2) 71(1094.7,444.6) 72(1094.7,464.3) 73(1094.7,484) 74(1094.7,503.7) 75(1094.7,523.4) 76(1094.7,543.1) 77(1094.7,562.8) 78(1094.7,582.5) 79(1094.7,602.2) 81(1094.7,641.6) 82(1094.7,661.3) 83(1094.7,681) 84(1094.7,700.7) 85(1094.7,720.4) 86(1094.7,740.1) 87(1094.7,759.8) 88(1094.7,779.5) 89(1094.7,799.2) 91(1094.7,838.6) 92(1094.7,858.3) 93(1094.7,878) 94(1094.7,897.7) 95(1094.7,917.4) 96(1094.7,937.1) 97(1094.7,956.8) 98(1094.7,976.5) 99(1094.7,996.2) 101(1094.7,1035.6) 102(1094.7,1055.3) 103(1094.7,1075) 104(1094.7,1094.7) 110(906.2,1184.7) 120(709.2,1184.7) 130(512.2,1184.7) 140(315.2,1184.7) 150(118.2,1184.7)
  oval 11x70 smd paste-3.5: 2(19.7,0) 3(39.4,0) 4(59.1,0) 5(78.8,0) 6(98.5,0) 7(118.2,0) 8(137.9,0) 9(157.6,0) 11(197,0) 12(216.7,0) 13(236.4,0) 14(256.1,0) 15(275.8,0) 16(295.5,0) 17(315.2,0) 18(334.9,0) 19(354.6,0) 21(394,0) 22(413.7,0) 23(433.4,0) 24(453.1,0) 25(472.8,0) 26(492.5,0) 27(512.2,0) 28(531.9,0) 29(551.6,0) 31(591,0) 32(610.7,0) 33(630.4,0) 34(650.1,0) 35(669.8,0) 36(689.5,0) 37(709.2,0) 38(728.9,0) 39(748.6,0) 41(788,0) 42(807.7,0) 43(827.4,0) 44(847.1,0) 45(866.8,0) 46(886.5,0) 47(906.2,0) 48(925.9,0) 49(945.6,0) 51(985,0) 52(1004.7,0) 105(1004.7,1184.7) 106(985,1184.7) 107(965.3,1184.7) 108(945.6,1184.7) 109(925.9,1184.7) 111(886.5,1184.7) 112(866.8,1184.7) 113(847.1,1184.7) 114(827.4,1184.7) 115(807.7,1184.7) 116(788,1184.7) 117(768.3,1184.7) 118(748.6,1184.7) 119(728.9,1184.7) 121(689.5,1184.7) 122(669.8,1184.7) 123(650.1,1184.7) 124(630.4,1184.7) 125(610.7,1184.7) 126(591,1184.7) 127(571.3,1184.7) 128(551.6,1184.7) 129(531.9,1184.7) 131(492.5,1184.7) 132(472.8,1184.7) 133(453.1,1184.7) 134(433.4,1184.7) 135(413.7,1184.7) 136(394,1184.7) 137(374.3,1184.7) 138(354.6,1184.7) 139(334.9,1184.7) 141(295.5,1184.7) 142(275.8,1184.7) 143(256.1,1184.7) 144(236.4,1184.7) 145(216.7,1184.7) 146(197,1184.7) 147(177.3,1184.7) 148(157.6,1184.7) 149(137.9,1184.7) 151(98.5,1184.7) 152(78.8,1184.7) 153(59.1,1184.7) 154(39.4,1184.7) 155(19.7,1184.7) 156(0,1184.7)
  rect 70x11 smd paste-3.5: 60(1094.7,227.9) 70(1094.7,424.9) 80(1094.7,621.9) 90(1094.7,818.9) 100(1094.7,1015.9) 160(-90,1035.6) 170(-90,838.6) 180(-90,641.6) 190(-90,444.6) 200(-90,247.6)
  oval 70x11 smd paste-3.5: 157(-90,1094.7) 158(-90,1075) 159(-90,1055.3) 161(-90,1015.9) 162(-90,996.2) 163(-90,976.5) 164(-90,956.8) 165(-90,937.1) 166(-90,917.4) 167(-90,897.7) 168(-90,878) 169(-90,858.3) 171(-90,818.9) 172(-90,799.2) 173(-90,779.5) 174(-90,759.8) 175(-90,740.1) 176(-90,720.4) 177(-90,700.7) 178(-90,681) 179(-90,661.3) 181(-90,621.9) 182(-90,602.2) 183(-90,582.5) 184(-90,562.8) 185(-90,543.1) 186(-90,523.4) 187(-90,503.7) 188(-90,484) 189(-90,464.3) 191(-90,424.9) 192(-90,405.2) 193(-90,385.5) 194(-90,365.8) 195(-90,346.1) 196(-90,326.4) 197(-90,306.7) 198(-90,287) 199(-90,267.3) 201(-90,227.9) 202(-90,208.2) 203(-90,188.5) 204(-90,168.8) 205(-90,149.1) 206(-90,129.4) 207(-90,109.7) 208(-90,90)
  silkscreen extent -48,42 1052,1142
REG2_REV8_REG1 [mil]
  oval 150x100 hole 60 mask+2.5: 1(0,0) 2(0,-200)
  silkscreen extent -400,-300 100,100
SM$2F$C_0805 [mil]
  rect 50x50 smd: 1(0,0) 2(84,0)
  silkscreen extent -38,-38 122,38
SM$2F$C_0805_C14 [mil]
  rect 50x50 smd: 1(0,0) 2(84,0)
  silkscreen extent -38,-38 122,38
SM$2F$D_1206_21 [mil]
  rect 56x92 smd: 1(0,0) 2(-117,0)
  silkscreen extent -169,-65 43,63
SM$2F$DO214AB_21 [mil]
  rect 102x146 smd: 1(0,0) 2(-280,0)
  silkscreen extent -288,-123 0,122
SM$2F$DO214AC_21 [mil]
  rect 100x90 smd: 1(0,0) 2(-170,0)
  silkscreen extent -182,-68 5,67
SM$2F$R_1206 [mil]
  rect 60x60 smd: 1(0,0) 2(130,0)
  silkscreen extent -45,-45 175,45
SM$2F$R_1206_R9 [mil]
  rect 60x60 smd: 1(0,0) 2(130,0)
  silkscreen extent -45,-45 175,45
SMD_DIPSW_100 [mil]
  rect 24x86 smd: 1(0,0) 9(700,375) 10(600,375) 11(500,375) 12(400,375) 13(300,375) 14(200,375) 15(100,375) 16(0,375)
  oval 24x86 smd: 2(100,0) 3(200,0) 4(300,0) 5(400,0) 6(500,0) 7(600,0) 8(700,0)
  silkscreen extent -25,62 725,313
SMD_RX4 [mil]
  rect 28x34 smd: 1(0,1) 2(50,1) 3(100,1) 4(150,1) 5(150,124) 6(100,124) 7(50,124) 8(0,124)
  silkscreen extent -25,25 175,100
SOG.050$2F$8$2F$WG.244$2F$L.225 [mil]
  rect 25x94 smd: 1(0,0) 5(150,196) 6(100,196) 7(50,196) 8(0,196)
  oval 25x94 smd: 2(50,0) 3(100,0) 4(150,0)
  silkscreen extent -38,60 188,136
SOG.050$2F$16$2F$WG.244$2F$L.375 [mil]
  rect 25x94 smd: 1(0,0) 9(350,196) 10(300,196) 11(250,196) 12(200,196) 13(150,196) 14(100,196) 15(50,196) 16(0,196)
  oval 25x94 smd: 2(50,0) 3(100,0) 4(150,0) 5(200,0) 6(250,0) 7(300,0) 8(350,0)
  silkscreen extent -13,60 362,136
SOT23_5_MILOS_REV4 [mil]
  rect 35x20 smd paste-1.5: 1(-5,0) 2(-5,-37.4) 3(-5,-74.8) 4(100,-74.8) 5(100,0)
  silkscreen extent 19,-88 75,12
SW12V_REV2_S1 [mil]
  round 200 hole 100 mask+5: 1(0,0) 2(300,0)
  silkscreen extent -150,-150 450,150
TELE$2F$TM.420FACE$2F$8X8_J2 [mil]
  rect 55x55 hole 34: 1(0,0) 2(-50,-100) 3(-100,0) 4(-150,-100) 5(-200,0) 6(-250,-100) 7(-300,0) 8(-350,-100)
  round 128 hole 128: HOLE31(50,250) HOLE32(-400,250)
  silkscreen extent -475,-155 125,670
TO263AA_GND_PLANE_REV1 [mil]
  rect 100x50 smd: 1(0,0) 2(0,-100) 3(0,-200)
  rect 412x425 smd: 4(343.75,-100)
  silkscreen extent 78,-325 562,125
TP33WW080-SPST_PADS [mil]
  rect 72x72 / inner round 72 / far side round 72 hole 52 mask+2.5: 1(0,0)
  round 72 hole 52 mask+2.5: 2(0,-100) 3(0,-200) 4(0,200)
  silkscreen extent -98,-250 98,702
VIKOR1 [mil]
  round 200 hole 100 mask+5: 1(1400,1900) 2(1000,1900) 3(400,1900) 4(0,1900) 5(1400,0) 6(1000,0) 7(700,0) 8(400,0) 9(0,0)
  silkscreen extent -350,-300 1750,2200
WAFER_PADS_REV2 [mil]
  rect 62x62 hole 38 mask+1.5: A1(3100,0) A10(2200,0) A20(1200,0) A31(100,0) B1(3100,100) B10(2200,100) B20(1200,100) B31(100,100) C0(2300,-100) D0(2300,-200)
  round 62 hole 38 mask+1.5: A2(3000,0) A3(2900,0) A4(2800,0) A5(2700,0) A6(2600,0) A7(2500,0) A8(2400,0) A9(2300,0) A11(2100,0) A12(2000,0) A13(1900,0) A14(1800,0) A15(1700,0) A16(1600,0) A17(1500,0) A18(1400,0) A19(1300,0) A21(1100,0) A22(1000,0) A23(900,0) A24(800,0) A25(700,0) A26(600,0) A27(500,0) A28(400,0) A29(300,0) A30(200,0) A32(0,0) B2(3000,100) B3(2900,100) B4(2800,100) B5(2700,100) B6(2600,100) B7(2500,100) B8(2400,100) B9(2300,100) B11(2100,100) B12(2000,100) B13(1900,100) B14(1800,100) B15(1700,100) B16(1600,100) B17(1500,100) B18(1400,100) B19(1300,100) B21(1100,100) B22(1000,100) B23(900,100) B24(800,100) B25(700,100) B26(600,100) B27(500,100) B28(400,100) B29(300,100) B30(200,100) B32(0,100) C1(2200,-100) C2(2100,-100) C3(2000,-100) C4(1900,-100) C5(1800,-100) C6(1700,-100) C7(1600,-100) C8(1500,-100) C9(1400,-100) C10(1300,-100) C11(1200,-100) C12(1100,-100) C13(1000,-100) C14(900,-100) C15(800,-100) C16(700,-100) C17(600,-100) C18(500,-100) C19(400,-100) D1(2200,-200) D2(2100,-200) D3(2000,-200) D4(1900,-200) D5(1800,-200) D6(1700,-200) D7(1600,-200) D8(1500,-200) D9(1400,-200) D10(1300,-200) D11(1200,-200) D12(1100,-200) D13(1000,-200) D14(900,-200) D15(800,-200) D16(700,-200) D17(600,-200) D18(500,-200) D19(400,-200)
  round 220 hole 160 mask+5: MTH1(-599.61,-200) MTH2(0,-200) MTH3(3150,-199.21) MTH4(100,3175) MTH5(3000,3175) MTH6(-599.61,5081.89) MTH7(3148.03,5081.89)
  silkscreen extent -941,-553 3297,5195

## Part data
U4 U5: "Rupa za Rittal-ov izvlakac"
U8: "CW_TASTER"
U9: "RST_TASTER"
U13: "LED8x1"

## Via types
v1: diameter 30, hole 20, Primary Component Side to Secondary Component Side, 245 vias
v2: diameter 50, hole 28, Primary Component Side to Secondary Component Side, 34 vias

## Nets (pads, with @x,y where several pads share a name; then routed paths per layer and width w, separated by ;. In a path a pad name is that pad's centre, name@x,y a point inside that pad or via, vN(x,y) a via of type N, cw(c..) or ccw(c..) an arc to the next point about the centre after c; other vN are vias at no path point)
+V: J16.A4 J16.B4 J16.C4 | length 200
  Primary Component Side w12: J16.C4@5878.5,3218.5 J16.B4@5978.5,3218.5 J16.A4@6078.5,3218.5
-V: J16.A5 J16.B5 J16.C5 | length 200
  Primary Component Side w12: J16.C5@5878.5,3118.5 J16.B5@5978.5,3118.5 J16.A5@6078.5,3118.5
/FLTB1: R27.2 U11.58 U14.4 | length 6127
  Primary Component Side w11: U14.4@2508.02,1760.5 2508.02,1696.98 v1(2513,1692) ; v1(2765,1483) 2838,1410 2838,1362.5 ; R27.2@2837.5,1273.75 2838,1274.25 2838,1362.5 ; v1(3825,3203) 3665.5,3203 2987.5,2525 2987.5,1475 2875,1362.5 2838,1362.5 ; v1(5137,3849) 5137,3852 5193.75,3908.75 5193.75,4030.25 5168.75,4057.25 5168.75,4543.75 5356.25,4731.25 5356.25,4912.5 5317.75,4951 U11.58@5238.45,4951
  Secondary Component Side w11: v1(2513,1692) 2513,1649.5 2681.25,1481.25 2763.25,1481.25 v1(2765,1483) ; v1(3825,3203) 3865.5,3203 3875,3212.5 4837.5,3212.5 5137.5,3510 5137.5,3849.5 v1(5137,3849)
/NVRAM_RST: U11.140 U16.1 | length 924.8
  Primary Component Side w11: U16.1@3957.5,6606.25 4008.75,6606.25 v1(4009,6606) ; v1(4237.5,6231.25) 4256.25,6231.25 4458.95,6028.55 U11.140@4458.95,5947.2
  Secondary Component Side w11: v1(4009,6606) 4009.25,6606.25 4037.5,6606.25 4112.5,6531.25 4112.5,6356.25 v1(4237.5,6231.25)
A0: RN13.7 S2.6 U11.79 | length 2317.3
  Primary Component Side w11: U11.79@5238.45,5364.7 5539.7,5364.7 5565,5390 5565,5515 v1(5562,5518) ; S2.6@5368.75,6512.5 5562.5,6512.5 ; v1(5562.5,6464.5) 5562.5,6512.5 ; RN13.7@5693.75,7119.75 5693.75,7081.25 5625,7012.5 5625,6575 5562.5,6512.5
  Secondary Component Side w11: v1(5562,5518) 5562.5,5517.5 v1(5562.5,6464.5)
A1: RN13.6 S2.5 U11.80 | length 2224.7
  Primary Component Side w11: U11.80@5238.45,5384.4 5503.15,5384.4 5529,5410.25 5529,5475 v1(5525,5479) ; S2.5@5368.75,6612.5 5531.25,6612.5 ; v1(5532,6572) 5532,6611.75 5531.25,6612.5 ; RN13.6@5643.75,7119.75 5643.75,7087.5 5581.25,7025 5581.25,6662.5 5531.25,6612.5
  Secondary Component Side w11: v1(5525,5479) 5525,6550 5532,6557 v1(5532,6572)
A2: RN13.5 S2.4 U11.81 | length 2145.4
  Primary Component Side w11: U11.81@5238.45,5404.1 5466.6,5404.1 v1(5493.75,5431.25) ; S2.4@5368.75,6712.5 5512.5,6712.5 ; v1(5512.5,6668.75) 5512.5,6712.5 ; RN13.5@5593.75,7119.75 5593.75,7093.75 5531.25,7031.25 5531.25,6731.25 5512.5,6712.5
  Secondary Component Side w11: v1(5493.75,5431.25) 5493.75,5443.75 5487.5,5450 5487.5,6643.75 v1(5512.5,6668.75)
A3: RN14.7 S2.3 U11.84 | length 2023.3
  Primary Component Side w11: U11.84@5238.45,5463.2 5286.8,5463.2 5306.25,5443.75 5445.75,5443.75 5456,5454 v1(5456,5455) ; S2.3@5368.75,6812.5 5456,6812.5 ; v1(5456,6782) 5456,6812.5 ; RN14.7@5456.25,7119.75 5456.25,7100 5493.75,7062.5 5493.75,6837.5 5468.75,6812.5 5456,6812.5
  Secondary Component Side w11: v1(5456,5455) 5457,5455 5457,5637.5 5456.25,5637.5 5456,5637.75 v1(5456,6782)
A4: RN14.6 S2.2 U11.86 | length 2147.9
  Primary Component Side w11: U11.86@5238.45,5502.6 5433.02,5502.6 5550,5618.75 5550,6037.5 5256.25,6331.25 5256.25,6850 5318.75,6912.5 S2.2@5368.75,6912.5 5425,6912.5 5456.25,6943.75 5456.25,7037.5 5406.25,7087.5 RN14.6@5406.25,7119.75
A5: RN14.5 S2.1 U11.87 | length 2036.9
  Primary Component Side w11: U11.87@5238.45,5522.3 5416.05,5522.3 5525,5631.25 5525,6018.75 5231.25,6312.5 5231.25,6931.25 5312.5,7012.5 S2.1@5368.75,7012.5 5368.75,7056.25 5356.25,7068.75 RN14.5@5356.25,7119.75
ADDRESS_MAX0: U11.153
ADDRESS_MAX1: U11.154
ADDRESS_MAX2: U11.159
ADDRESS_MAX3: U11.160
ADDRESS_MAX4: U11.161
ADDRESS_MAX5: U11.162
ADDRESS_MAX6: U11.163
ADDRESS_MAX7: U11.164
ADDRESS_MAX_BUS0: J16.B16 J16.C16 RN3.8 | length 3297.3
  Primary Component Side w11: v1(3806.25,2112.5) 3775,2143.75 3775,2925 3936.5,3086.5 RN3.8@3968.75,3086.5
  Secondary Component Side w11: v1(3806.25,2112.5) 3900,2018.5 J16.C16@5878.5,2018.5 J16.B16@5978.5,2018.5
ADDRESS_MAX_BUS1: J16.B17 J16.C17 RN3.7 | length 3270.2
  Primary Component Side w11: RN3.7@4018.75,3086.5 4018.75,3056.25 3993.75,3031.25 3943.75,3031.25 3818.75,2906.25 3818.75,2208.25 v1(4108.25,1918.75)
  Secondary Component Side w11: v1(4108.25,1918.75) 4118.75,1918.75 4119,1918.5 J16.C17@5878.5,1918.5 J16.B17@5978.5,1918.5
ADDRESS_MAX_BUS2: J16.B18 J16.C18 RN3.6 | length 2972
  Primary Component Side w11: RN3.6@4068.75,3086.5 4068.75,3056.25 4093.75,3031.25 4137.5,3031.25 4162.5,3006.25 4162.5,2631.25 4150,2618.75 4150,2150 4437.5,1862.5 v1(4505.5,1862.5)
  Secondary Component Side w11: v1(4505.5,1862.5) 4549.5,1818.5 J16.C18@5878.5,1818.5 J16.B18@5978.5,1818.5
ADDRESS_MAX_BUS3: J16.B19 J16.C19 RN3.5 | length 2869.2
  Primary Component Side w11: RN3.5@4118.75,3086.5 4138.5,3086.5 4187.5,3037.5 4187.5,2881.25 4431.25,2637.5 4431.25,2037.75 v1(4750.25,1718.75)
  Secondary Component Side w11: v1(4750.25,1718.75) 4800,1718.75 4800.25,1718.5 J16.C19@5878.5,1718.5 J16.B19@5978.5,1718.5
ADDRESS_MAX_BUS4: J16.B20 J16.C20 RN4.8 | length 2824.6
  Primary Component Side w11: RN4.8@4275,3086.5 4249,3086.5 4212.5,3050 4212.5,2912.5 4468.75,2656.25 4468.75,2131.25 4980,1620 v1(5009,1620)
  Secondary Component Side w11: v1(5009,1620) 5179.5,1620 5181,1618.5 J16.C20@5878.5,1618.5 J16.B20@5978.5,1618.5
ADDRESS_MAX_BUS5: J16.B21 J16.C21 RN4.7 | length 2793.1
  Primary Component Side w11: RN4.7@4325,3086.5 4325,3043.75 4312.5,3031.25 4256.25,3031.25 4237.5,3012.5 4237.5,2937.5 4525,2650 4600,2650 4750,2500 4750,2087.5 5275.25,1562.25 5275,1562 v1(5273,1562)
  Secondary Component Side w11: v1(5273,1562) 5488,1562 5531.5,1518.5 J16.C21@5878.5,1518.5 J16.B21@5978.5,1518.5
ADDRESS_MAX_BUS6: J16.B22 J16.C22 RN4.6 | length 2619.7
  Primary Component Side w11: RN4.6@4375,3086.5 4375,3062.5 4406.25,3031.25 4443.75,3031.25 4468.75,3006.25 4468.75,2837.5 4737.17,2568.75 4737.5,2568.75 4793.75,2512.5 4793.75,2156.25 5218.75,1731.25 5218.75,1725.23 v1(5495,1449.25)
  Secondary Component Side w11: v1(5495,1449.25) 5525.25,1418.5 J16.C22@5878.5,1418.5 J16.B22@5978.5,1418.5
ADDRESS_MAX_BUS7: J16.B23 J16.C23 RN4.5 | length 2648.6
  Primary Component Side w11: RN4.5@4425,3086.5 4451,3086.5 4493.75,3043.75 4493.75,2856.45 4850,2500 4850,2175.25 5558,1467 v1(5558,1360)
  Secondary Component Side w11: v1(5558,1360) 5558.75,1360 5600.25,1318.5 J16.C23@5878.5,1318.5 J16.B23@5978.5,1318.5
AEN: S3.A11 U11.148 | length 4102.1
  Primary Component Side w11: v1(2920,6098) 2921,6097 3506.25,6097 3522,6112.5 4225,6112.5 4301.35,6036.15 U11.148@4301.35,5947.2
  Secondary Component Side w11: S3.A11@2763.75,3600 2768.75,3600 2812.5,3643.75 2812.5,3856.25 2887.5,3931.25 2887.5,4937.5 2856.25,4968.75 2856.25,6037.5 2916.75,6098 v1(2920,6098)
ALE: S3.B28 U11.108 | length 5734.7
  Primary Component Side w11: v1(2378,5906) 2378.25,5906.25 2756.25,5906.25 2781.25,5931.25 3908.75,5931.25 v1(3908,5932) ; v1(4958.5,6160.25) 4983.5,6160.25 5089.35,6054.4 U11.108@5089.35,5947.2
  Secondary Component Side w11: S3.B28@1063.75,3700 1063.75,3826.25 2268.75,5031.25 2268.75,5793.75 2378,5903 v1(2378,5906) ; v1(3908,5932) 3913,5937 3963,5937 3981.25,5918.75 4087.5,5918.75 4150,5981.25 4779.5,5981.25 v1(4958.5,6160.25)
BALE: J16.B25 J16.C25 RN2.7 U11.168 | length 5812.6
  Primary Component Side w11: U11.168@4053.75,5640.5 4109.5,5640.5 4118.75,5631.25 v1(4118.75,5606.25) ; v1(4606.25,3500) 4606.25,3173 4568.75,3137.5 4568.75,2924.4 4899.4,2593.75 5112.5,2593.75 5406.25,2300 5406.25,2225 5700,1931.25 5700,1193 v1(5694,1187) 5693.5,1187.5 RN2.7@5642.75,1187.5
  Secondary Component Side w11: v1(4118.75,5606.25) 4118.75,5587.5 3981.25,5450 3981.25,4581.25 4606.25,3956.25 v1(4606.25,3500) ; v1(5694,1187) 5694,1174.25 5750.25,1118.5 J16.C25@5878.5,1118.5 J16.B25@5978.5,1118.5
BASE_ADDR_JP0: J11.1 RN10.8 U11.21 | length 2038.1
  Primary Component Side w11: U11.21@4537.75,4762.5 4537.75,4862.5 4543.75,4868.5 4543.75,4868.75 4562.5,4887.5 4593.75,4887.5 4893,5186.75 4900.75,5186.75 v1(4910,5196) ; RN10.8@5781.25,5751 5781.25,5706.25 5768.75,5693.75 J11.1@5768.75,5606.25 5793.75,5606.25 5843,5556.25 5843,5396 v1(5840,5393)
  Secondary Component Side w11: v1(4910,5196) 4907.75,5193.75 5143.75,5193.75 5168.75,5218.75 5212.5,5218.75 5325,5331.25 5775,5331.25 5836.75,5393 v1(5840,5393)
BASE_ADDR_JP1: J13.1 RN10.7 U11.22 | length 2129.2
  Primary Component Side w11: v1(4557.45,4682.45) U11.22@4557.45,4762.5 ; v1(4825,4850) 4856.25,4880 5125,4880 v1(5126,4879) ; v1(5644,5272) 5643.75,5272.25 5643.75,5362.5 5618.75,5387.5 5618.75,5575 5650,5606.25 J13.1@5668.75,5606.25 5668.75,5650 5731.25,5712.5 RN10.7@5731.25,5751
  Secondary Component Side w11: v1(4557.45,4682.45) 4577.4,4662.5 4681.25,4662.5 4825,4806.25 v1(4825,4850) ; v1(5126,4879) 5154,4879 5175,4900 5175,4900.47 5268.75,4993.22 5268.75,5200 5350,5281.25 5603.25,5281.25 5612.5,5272 v1(5644,5272)
BIQ_1: J16.B29 J16.C29 RN1.7 U11.25 | length 4848.8
  Primary Component Side w11: v1(4581,4579) 4581.25,4579.25 4581.25,4606.25 4616.55,4641.55 U11.25@4616.55,4762.5 ; v1(5018,3555) 5018,3419.5 5237.5,3200 5237.5,2850 5568.75,2518.75 5568.75,2218.75 5731.25,2056.25 5731.25,768.75 ; RN1.7@5642.75,768.75 5731.25,768.75 ; v1(5760,735) 5752.5,735 5731.25,756.25 5731.25,768.75
  Secondary Component Side w11: v1(4581,4579) 4581.25,4578.75 4581.25,4037.5 4656.25,3962.5 4656.25,3916.75 v1(5018,3555) ; v1(5760,735) 5771.25,735 5787.5,718.75 5878.25,718.75 J16.C29@5878.5,718.5 J16.B29@5978.5,718.5
BIQ_2: J16.B30 J16.C30 RN1.6 U11.112 | length 6178.9
  Primary Component Side w11: v1(4849,5277) 4881.25,5309.25 4881.25,5650 5010.55,5779.3 U11.112@5010.55,5947.2 ; v1(5023,3736) 5112.5,3646.5 5112.5,3475 5287.5,3300 5287.5,2900 5643.75,2543.75 5643.75,2281.25 5806.25,2118.75 5806.25,618.5 ; RN1.6@5642.75,718.75 5681.25,718.75 5781.5,618.5 5806.25,618.5 ; J16.C30@5878.5,618.5 5806.25,618.5
  Secondary Component Side w11: v1(4849,5277) 4849,5268.75 4837.5,5257.25 4837.5,5175 4893.75,5118.75 4893.75,3865.25 v1(5023,3736) ; J16.C30@5878.5,618.5 J16.B30@5978.5,618.5
BRD: J16.B27 J16.C27 RN2.5 U11.169 | length 6031.7
  Primary Component Side w11: v1(3947,5630) 3954.5,5637.5 3999.25,5637.5 4016.57,5620.8 U11.169@4053.75,5620.8 ; v1(4518.75,3487.5) 4518.75,2881.25 4868.75,2531.25 5068.75,2531.25 5306.25,2293.75 5306.25,2175 5612.5,1868.75 5612.5,1356.25 5568.75,1312.5 5568.75,1106.25 v1(5587.5,1087.5) RN2.5@5642.75,1087.5
  Secondary Component Side w11: v1(3947,5630) 3947,5628.25 3925,5606.25 3925,4543.75 4525,3943.75 4525,3525 4518.75,3518.75 v1(4518.75,3487.5) ; v1(5587.5,1087.5) 5756.25,918.75 5878.25,918.75 J16.C27@5878.5,918.5 J16.B27@5978.5,918.5
BRDY: J16.B24 J16.C24 RN2.8 U11.110 | length 7327.2
  Primary Component Side w11: U11.110@5049.95,5947.2 5049.95,5768.7 4912.5,5631.25 4912.5,5581.25 4975,5518.75 4975,5181.25 4925,5131.25 4925,5093.75 5093.75,4925 5131.25,4925 5175,4881.25 5175,4837.5 5200,4812.5 v1(5231.25,4812.5) ; RN2.8@5642.75,1237.5 5642.75,1267.75 v1(5656.25,1281.25) ; v1(5963,5200) 6243.75,4919.25 6243.75,4000 6025,3781.25 6025,3706.25 6193.75,3537.5 6193.75,1343.75 6118.75,1268.75 6025,1268.75 5978.5,1222.25 J16.B24@5978.5,1218.5
  Secondary Component Side w11: v1(5231.25,4812.5) 5293.75,4875 5293.75,5187.5 5362.5,5256.25 5581.25,5256.25 5612.5,5225 5820,5225 5845,5200 v1(5963,5200) ; v1(5656.25,1281.25) 5706.25,1281.25 5769,1218.5 J16.C24@5878.5,1218.5 J16.B24@5978.5,1218.5
BWR: J16.B26 J16.C26 RN2.6 U11.170 | length 5866.4
  Primary Component Side w11: v1(3971,5576) 3996.1,5601.1 U11.170@4053.75,5601.1 ; v1(4561,3471) 4561,3292.25 4543.75,3275 4543.75,2906.25 4862.5,2587.5 4862.6,2587.5 4886.9,2562.5 5093.75,2562.5 5362.5,2293.75 5362.5,2204.6 5658,1912.1 5658,1345.5 5600,1287.5 5600,1156.25 5618.75,1137.5 RN2.6@5642.75,1137.5 5675,1137.5 5693.75,1118.75 v1(5693.75,1056.25)
  Secondary Component Side w11: v1(3971,5576) 3969.75,5576 3950,5556.25 3950,4562.5 4562.5,3950 4562.5,3469.5 v1(4561,3471) ; v1(5693.75,1056.25) 5731.5,1018.5 J16.C26@5878.5,1018.5 J16.B26@5978.5,1018.5
CLK0: U11.181 U12.3 | length 1535
  Primary Component Side w11: 3984.35,5384.4 U11.181@4053.75,5384.4
  Primary Component Side w12: 3968.75,5400 3984.35,5384.4
  Primary Component Side w15: v2(2962.5,5112.5) U12.3@2962.5,5191.25 ; v1(3560,5494) 3560.25,5493.75 3575,5493.75 3668.75,5400 3968.75,5400
  Secondary Component Side w15: v2(2962.5,5112.5) 3025,5050 3293.75,5050 3506.25,5262.5 3506.25,5450 3550.25,5494 v1(3560,5494)
CLK1: RN11.5 U11.182 | length 1067.9
  Primary Component Side w11: RN11.5@3106.25,5507.25 3106.25,5525 3150,5568.75 3287.5,5568.75 3368.75,5487.5 3507.15,5487.5 3629.95,5364.7 U11.182@4053.75,5364.7
CLK2: RN11.8 U11.183 | length 883.3
  Primary Component Side w11: RN11.8@3256.25,5507.25 3256.25,5475 3268.75,5462.5 3493.27,5462.5 3611.78,5345 U11.183@4053.75,5345
CLK3: RN11.7 U11.184 | length 949
  Primary Component Side w11: RN11.7@3206.25,5507.25 3206.25,5462.5 3231.25,5437.5 3474.83,5437.5 3587.33,5325.3 U11.184@4053.75,5325.3
CW6: JP4.1 RN9.5 U11.147 | length 8073.1
  Primary Component Side w11: v1(714,4545.75) 2350,6181.25 2906.25,6181.25 2950,6137.5 4237.5,6137.5 4321.05,6053.95 U11.147@4321.05,5947.2 ; v1(993.75,2050) 1006.25,2037.5 RN9.5@1006.25,1988.5
  Secondary Component Side w11: v1(714,4545.75) 714,3864.5 712.5,3862.5 712.5,3218.75 937.5,2993.75 937.5,2562.5 943.75,2556.25 943.75,2050 ; JP4.1@975,1225 931.25,1225 875,1281.25 875,1943.75 943.75,2012.5 943.75,2050 ; v1(993.75,2050) 943.75,2050
CW7_W/C: R12.1 U8.1 U11.142 | length 8903
  Primary Component Side w11: v1(187.5,4137.5) 231.25,4181.25 281.25,4181.25 2318.75,6218.75 3100,6218.75 3125,6193.75 4256.25,6193.75 4419.55,6030.45 U11.142@4419.55,5947.2
  Primary Component Side w12: U8.1@410,1256.25 406.25,1256.25 406.25,1331.25 450,1375 612.5,1375 R12.1@712.5,1475
  Secondary Component Side w11: v1(187.5,4137.5) 187.5,3100 325,2962.5 325,2606.25 462.5,2468.75 506.25,2468.75 603.9,2371.1 603.9,2133.6 564.05,2093.75 489.92,2093.75 425,2028.83 425,1410.25 410,1395.25 U8.1@410,1256.25
DATA_ISA0: S3.A9 U11.28 | length 2424.4
  Primary Component Side w11: S3.A9@2963.75,3600 3012.5,3648.75 3012.5,3762.5 3456.25,4206.25 4400,4206.25 4675.65,4481.9 U11.28@4675.65,4762.5
DATA_ISA1: S3.A8 U11.29 | length 2365.5
  Primary Component Side w11: S3.A8@3063.75,3600 3112.5,3648.75 3112.5,3762.5 3518.75,4168.75 4418.75,4168.75 4695.35,4445.35 U11.29@4695.35,4762.5
DATA_ISA2: S3.A7 U11.31 | length 2311.1
  Primary Component Side w11: S3.A7@3163.75,3600 3212.5,3648.75 3212.5,3768.75 3581.25,4137.5 4431.25,4137.5 4734.75,4441 U11.31@4734.75,4762.5
DATA_ISA3: S3.A6 U11.33 | length 2267.7
  Primary Component Side w11: S3.A6@3263.75,3600 3263.75,3601.25 3312.5,3650 3312.5,3787.5 3625,4100 4443.75,4100 4774.15,4430.4 U11.33@4774.15,4762.5
DATA_ISA4: S3.A5 U11.34 | length 2208.1
  Primary Component Side w11: S3.A5@3363.75,3600 3368.75,3600 3412.5,3643.75 3412.5,3781.25 3693.75,4062.5 4462.5,4062.5 4793.85,4393.85 U11.34@4793.85,4762.5
DATA_ISA5: S3.A4 U11.35 | length 2141.9
  Primary Component Side w11: S3.A4@3463.75,3600 3468.75,3600 3512.5,3643.75 3512.5,3775 3768.75,4031.25 4480.93,4031.25 4813.55,4363.22 U11.35@4813.55,4762.5
DATA_ISA6: S3.A3 U11.36 | length 2083.7
  Primary Component Side w11: S3.A3@3563.75,3600 3612.5,3648.75 3612.5,3781.25 3831.25,4000 4506.25,4000 4833.25,4327 U11.36@4833.25,4762.5
DATA_ISA7: S3.A2 U11.37 | length 2032.2
  Primary Component Side w11: S3.A2@3663.75,3600 3712.5,3648.75 3712.5,3800 3881.25,3968.75 4525,3968.75 4852.95,4296.7 U11.37@4852.95,4762.5